# Altium PCB Psyduck.PcbDoc
Units mil, origin at the board's own origin, x right, y up, seen from the top; angles counter-clockwise.
Board outline 1737.95 x 1000.79 mil, 2 copper layers (Top Layer, Bottom Layer); 27 components, 22 nets, 107 pads, 17 vias.
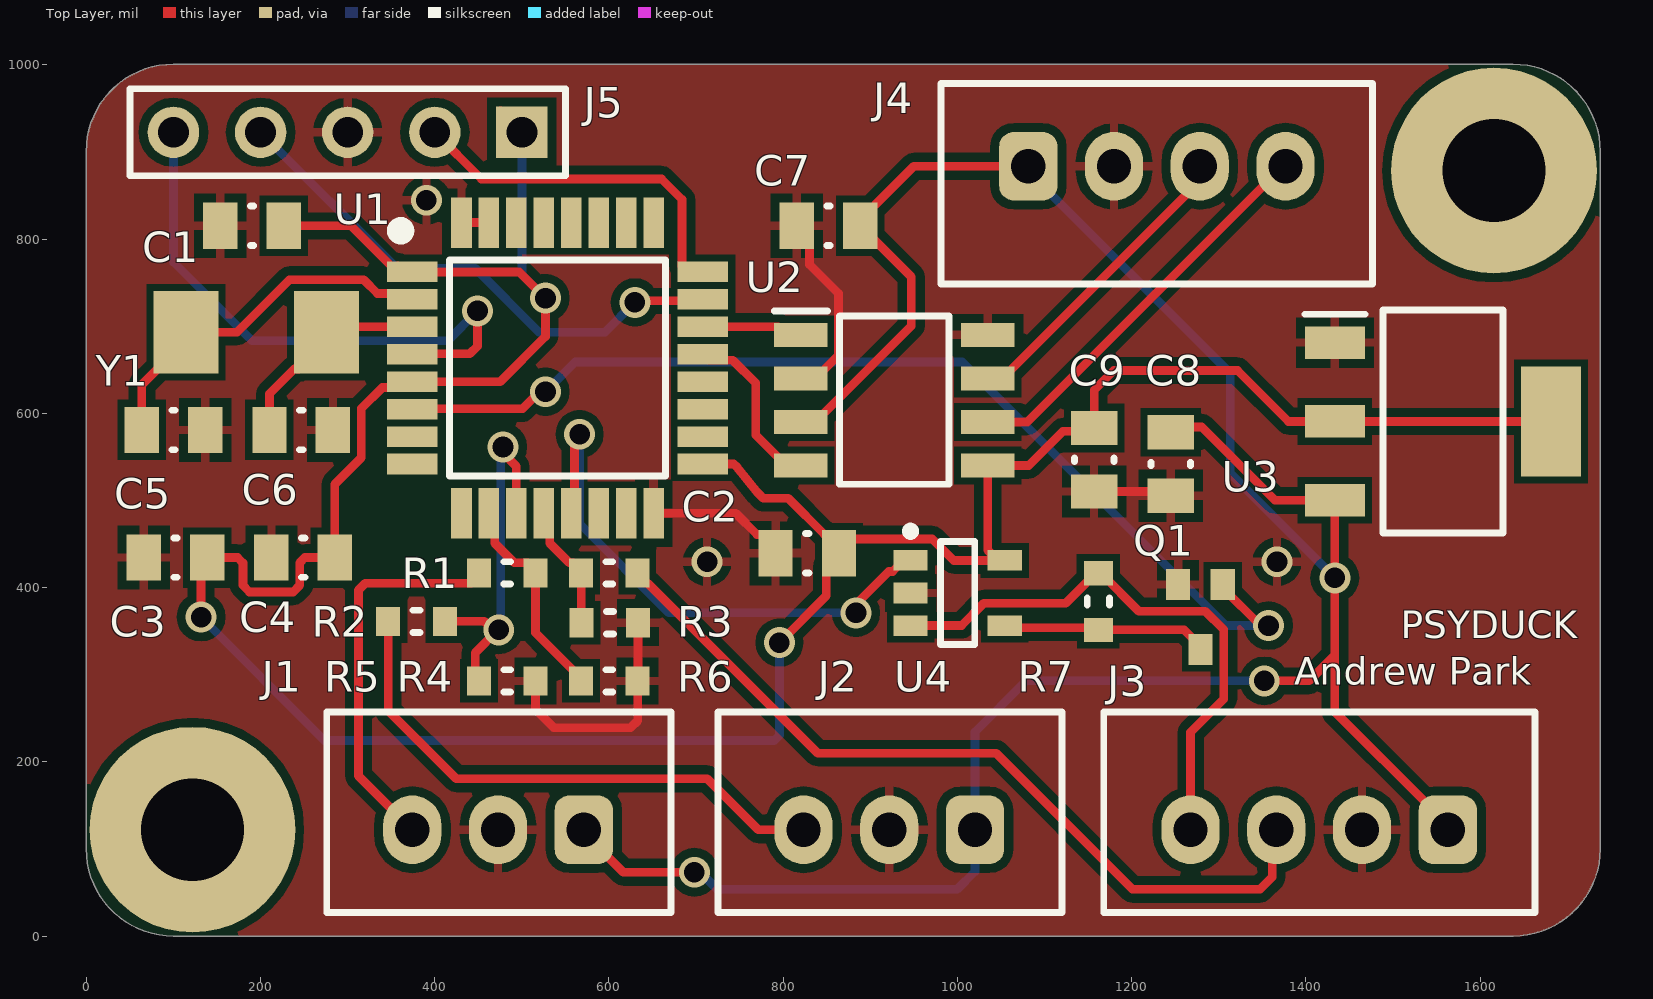
[diagram p0: Top Layer view]
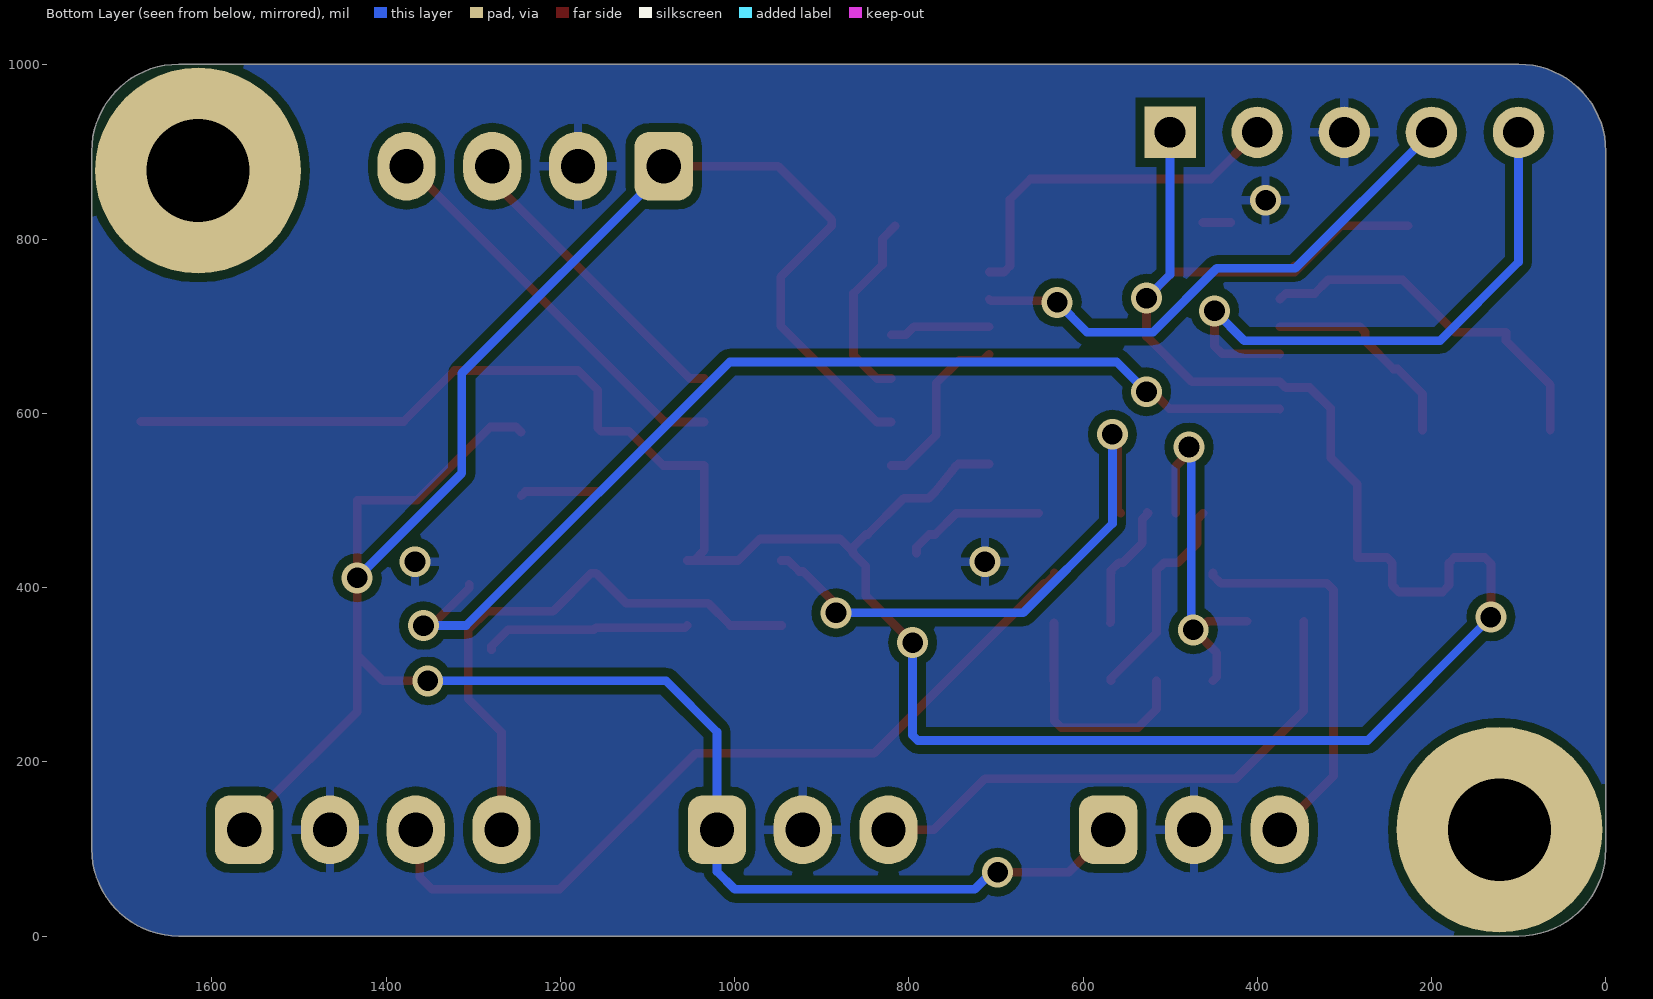
[diagram p1: Bottom Layer view, seen from below]
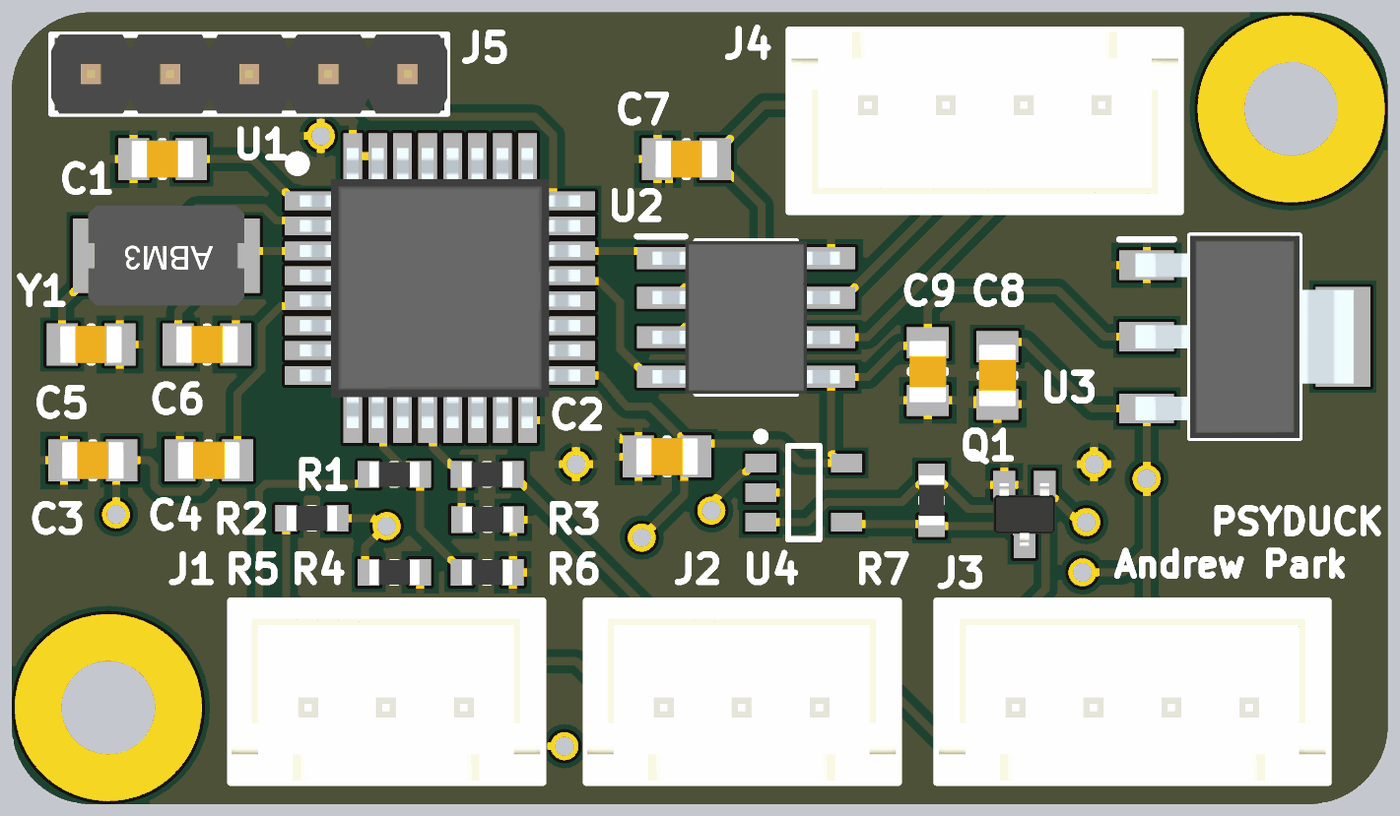
[diagram p2: 3D render of the assembled board from above, using the file's embedded part models]

## Layer stack, top to bottom
Top Solder: solder mask 0.4, Solder Resist, Dk 3.5
Top Layer: signal copper 1.4
Dielectric 1: dielectric 12.6, FR-4, Dk 4.8
Bottom Layer: signal copper 1.4
Bottom Solder: solder mask 0.4, Solder Resist, Dk 3.5

## Board outline
0,900.79 cw(c100,900.79) 100,1000.79 1637.95,1000.79 cw(c1637.95,900.79) 1737.95,900.79 1737.95,100 cw(c1637.95,100) 1637.95,0 100,0 cw(c100,100) 0,100

## Design rules (kind name [scope] priority, off if disabled: settings)
Clearance Clearance_1 [All] p1: gap=10 ignorepadtopadclearanceinfootprint=FALSE except(0: Arc-Hole Track-Hole SMDPad-Hole THPad-Hole Via-Hole Fill-Hole Poly-Hole Region-Hole Text-Text Text-Hole; 5: Arc-Arc Arc-Track Track-Track SMDPad-SMDPad; 7.87: Arc-SMDPad Track-SMDPad SMDPad-Fill SMDPad-Poly SMDPad-Region)
Clearance [All] p2: gap=10 ignorepadtopadclearanceinfootprint=FALSE except(0: Arc-Hole Track-Hole SMDPad-Hole THPad-Hole Via-Hole Fill-Hole Poly-Hole Region-Hole Text-Text Text-Hole; 5: Arc-Arc Arc-Track Track-Track SMDPad-SMDPad; 7.87: Arc-SMDPad Track-SMDPad SMDPad-Fill SMDPad-Poly SMDPad-Region)
ComponentClearance ComponentClearance_1 [InComponentClass('All Components') And (HasFootprint('0603 - Resistor'))] p1: gap=0 collisioncheckmode=3 verticalgap=10 showdistances=FALSE
ComponentClearance [All] p2: gap=10 collisioncheckmode=3 verticalgap=10 showdistances=FALSE
DiffPairsRouting [All] p1: maxlimit=10 minlimit=10 mostfreqgap=10 substack1={6880419E-5F7E-40DC-B808-49A93CB59D2A} toplayer_{6880419e-5f7e-40dc-b808-49a93cb59d2a}_minwidth=15 toplayer_{6880419e-5f7e-40dc-b808-49a93cb59d2a}_maxwidth=15 toplayer_{6880419e-5f7e-40dc-b808-49a93cb59d2a}_prefwidth=15 bottomlayer_{6880419e-5f7e-40dc-b808-49a93cb59d2a}_minwidth=15 bottomlayer_{6880419e-5f7e-40dc-b808-49a93cb59d2a}_maxwidth=15 bottomlayer_{6880419e-5f7e-40dc-b808-49a93cb59d2a}_prefwidth=15 toplayer_minwidth=15 toplayer_maxwidth=15 toplayer_prefwidth=15 bottomlayer_minwidth=15 bottomlayer_maxwidth=15 bottomlayer_prefwidth=15 maxuncoupledlength=500
PolygonConnect [All] p1: connectstyle=Relief reliefconductorwidth=10 reliefentries=4 polygonreliefangle="90 Angle" airgapwidth=10
RoutingVias [All] p1: holewidth=19.68 width=39.37 viastyle="Through Hole" minholewidth=7.87 minwidth=23.62 maxholewidth=28 maxwidth=50
SilkToSolderMaskClearance [IsPad] p1: minsilkscreentomaskgap=5.91 clearancetoexposedcopper=TRUE
SolderMaskExpansion [All] p1: expansion=4 istentingtop=FALSE
Width [All] p1: maxlimit=15 minlimit=10 preferedwidth=15 substack1={6880419E-5F7E-40DC-B808-49A93CB59D2A} toplayer_prefwidth=10 minimp=50.000000 maximp=50.000000 favimp=50.000000
26 further rules are at their usual default settings.

## Components (designator, comment, footprint, x,y, rotation, side; value= is the part's Value field where it differs from the comment)
C1 "Capacitor - Nonpolarized" "0805 - Capacitor" 190.39,815.28 r0 top value=100nF
C2 "Capacitor - Nonpolarized" "0805 - Capacitor" 827.68,439.37 r0 top value=100nF
C3 "Capacitor - Nonpolarized" "0805 - Capacitor" 102.52,434.49 r0 top value=10nF
C4 "Capacitor - Nonpolarized" "0805 - Capacitor" 248.98,434.49 r0 top value=1uF
C5 "Capacitor - Nonpolarized" "0805 - Capacitor" 100.28,580.94 r180 top value=28pF
C6 "Capacitor - Nonpolarized" "0805 - Capacitor" 246.73,580.94 r180 top value=28pF
C7 "Capacitor - Nonpolarized" "0805 - Capacitor" 852.09,815.28 r0 top value=100nF
C8 "Capacitor - Nonpolarized" "0805 - Capacitor" 1244.88,541.89 r90 top value=10mF
C9 "Capacitor - Nonpolarized" "0805 - Capacitor" 1157.01,546.77 r90 top value=10mF
J1 "B3B-EH-A" B3B-XH 571.18,122.05 r180 top
J2 "B3B-EH-A" B3B-XH 1020.32,122.05 r180 top
J3 "1x4 Header" B4B-XH 1562.99,122.05 r180 top
J4 "1x4 Header" B4B-XH 1081.42,883.62 r0 top
J5 "1x5 Header" HDR1X5 500.16,922.68 r180 top
Q1 "MOSFET-N" SC70/SOT323 1279.06,366.14 r0 top
R1 "Resistor" "0603 - Resistor" 483.31,416.81 r0 top value=10k
R2 "Resistor" "0603 - Resistor" 379.09,361.26 r0 top value=10k
R3 "Resistor" "0603 - Resistor" 600.47,416.81 r180 top value=10k
R4 "Resistor" "0603 - Resistor" 600.47,292.91 r180 top value=20k
R5 "Resistor" "0603 - Resistor" 483.31,292.91 r180 top value=20k
R6 "Resistor" "0603 - Resistor" 601.15,359.71 r180 top value=20k
R7 "Resistor" "0603 - Resistor" 1161.89,383.98 r90 top value=500m
U1 "STM32F303K6T6" QFP80P900X900X160-32N 541.02,652.13 r0 top
U2 "TJA1051T_3,118" TJA1051T/3,118 927.56,615.12 r0 top
U3 "TLV1117-33IDCYR" TLV1117 1557.32,590.71 r0 top
U4 "INA180" INA180 1000.35,393.78 r0 top
Y1 "Oscillator" "2-SMD NO LEAD CRSYSTAL" 195.28,693.23 r180 top

## Footprints (in the part's own frame and the unit in brackets; to place one, negate y for a bottom-side part, rotate by r counter-clockwise, add the part's x,y. Pads: shape width x height; smd on the part's side, far side on the other; paste and mask are expansions set on the pad)
"2-SMD NO LEAD CRSYSTAL" [mm]
  rect 1.9x2.4 smd: 1(-2.05,0) 2(2.05,0)
  body extent -2.5,-1.6 2.5,1.6, height 1.3
"0603 - Resistor" [mm] "0603 Chip Resistor - IPC Medium Density"
  rect 0.7x0.85 smd: 1(-0.825,0) 2(0.825,0)
  silkscreen extent -0.1,-0.33 0.1,0.33, body extent -0.8,-0.4 0.8,0.4, height 0.45
"0805 - Capacitor" [mm] "0805 Chip Capacitor - IPC Medium Density"
  rect 1x1.35 smd: 1(-0.925,0) 2(0.925,0)
  silkscreen extent -0.05,-0.58 0.05,0.58, body extent -1,-0.6 1,0.6, height 1.2
B3B-XH [mm] "JST 3-pin connector"
  rrect50% 1.7x2 hole 1: 1(0,0)
  oval 1.7x2 hole 1: 2(2.5,0) 3(5,0)
  silkscreen extent -2.54,-3.43 7.49,2.41, body extent -2.45,-3.4 7.45,2.35, height 7
B4B-XH [mm] "JST 4-Pin"
  rrect50% 1.7x2 hole 1: 1(0,0)
  oval 1.7x2 hole 1: 2(2.5,0) 3(5,0) 4(7.5,0)
  silkscreen extent -2.54,-3.43 10.03,2.41, body extent -2.45,-3.4 9.95,2.35, height 7
HDR1X5 [mm] "Connector; Header; 5 Position"
  rect 1.5x1.5 hole 0.9: 1(0,0)
  round 1.5 hole 0.9: 2(2.54,0) 3(5.08,0) 4(7.62,0) 5(10.16,0)
  silkscreen extent -1.27,-1.27 11.43,1.27, body extent -1.27,-1.27 11.43,1.27, height 8.54
INA180 [mm] "SOT23, 5-Leads, Body 2.80x2.80mm, Pitch 0.95mm, IPC Medium Density"
  rect 1x0.6 smd: 1(-1.375,0.95) 2(-1.375,0) 3(-1.375,-0.95) 4(1.375,-0.95) 5(1.375,0.95)
  silkscreen extent -1.5,-1.5 0.5,1.92, body extent -0.88,-1.5 0.87,1.5, height 1.1
QFP80P900X900X160-32N [mm]
  rect 1.475x0.6 smd: 1(-4.238,2.8) 2(-4.238,2) 3(-4.238,1.2) 4(-4.238,0.4) 5(-4.238,-0.4) 6(-4.238,-1.2) 7(-4.238,-2) 8(-4.238,-2.8) 17(4.238,-2.8) 18(4.238,-2) 19(4.238,-1.2) 20(4.238,-0.4) 21(4.238,0.4) 22(4.238,1.2) 23(4.238,2) 24(4.238,2.8)
  rect 0.6x1.475 smd: 9(-2.8,-4.238) 10(-2,-4.238) 11(-1.2,-4.238) 12(-0.4,-4.238) 13(0.4,-4.238) 14(1.2,-4.238) 15(2,-4.238) 16(2.8,-4.238) 25(2.8,4.238) 26(2,4.238) 27(1.2,4.238) 28(0.4,4.238) 29(-0.4,4.238) 30(-1.2,4.238) 31(-2,4.238) 32(-2.8,4.238)
  silkscreen extent -4.77,-3.15 3.15,4.2, body extent -4.5,-4.5 4.5,4.5, height 1.6
SC70/SOT323 [mm]
  rect 0.7x0.9 smd: 1(0.65,0.95) 2(0,-0.95) 3(-0.65,0.95)
  body extent -1,-1 1,1, height 1.05
TJA1051T/3,118 [mm] "SOIC127P600X175-8N"
  rect 1.55x0.7 smd: 1(-2.725,1.905) 2(-2.725,0.635) 3(-2.725,-0.635) 4(-2.725,-1.905) 5(2.725,-1.905) 6(2.725,-0.635) 7(2.725,0.635) 8(2.725,1.905)
  silkscreen extent -3.5,-2.45 1.6,2.61, body extent -3,-2.45 3,2.45, height 1.75
TLV1117 [mm] "SOT230P700X180-4N"
  rect 1.75x0.95 smd: 1(-3.15,2.3) 2(-3.15,0) 3(-3.15,-2.3)
  rect 1.75x3.2 smd: 2(3.15,0)
  silkscreen extent -4.03,-3.25 1.75,3.25, body extent -3.5,-3.25 3.5,3.25, height 1.8

## Part data
C1 C2 C3 C4 C5 C6 C7 C8 C9: "Nonpolarized Capacitor"
J1 J2: library part "1x3 Header", "1x3 Pin Header"
J3 J4: "1x4 Pin Header"
J5: "1x5 Pin Header"
Q1: "N-Channel MOSFET"
U1: "Integrated Circuit"
U2: "CAN Transceiver IC 4.5V-5.5V 250ns", Manufacturer=NXP, Manufacturer Part Number=TJA1051T/3,118, Supplier Part Number=568-8684-1-ND, Datasheet=http://www.nxp.com/docs/en/data-sheet/TJA1051.pdf, Supplier=Digikey
U3: "Linear Voltage Regulator IC 3.3V 800MA SOT223-4", Manufacturer="Texas Instruments", Supplier Part Number=296-21112-1-ND, Datasheet=http://www.ti.com/lit/ds/symlink/tlv1117.pdf?HQS=TI-null-null-digikeymode-df-pf-null-wwe&ts=1590668900314, Manufacturer Part Number=TLV1117-33IDCYR, Supplier=Digikey
U4: "0V to 26V Current Sense Amplifier", Manufacturer="Texas Instruments", Manufacturer Part Number=INA180A2IDBVR, Supplier Part Number=296-47653-1-ND, Datasheet=https://www.ti.com/lit/ds/symlink/ina180.pdf, Supplier=Digikey
Y1: "Crystal Oscillator"

## Free pads (board coordinates)
  round 236.22 hole 118.11: MOUNT1(1615.91,878.74) MOUNT2(122.05,122.05)

## Via types
v1: diameter 35.43, hole 23.62, Top Layer to Bottom Layer, 17 vias

## Nets (pads, with @x,y where several pads share a name; then routed paths per layer and width w, separated by ;. In a path a pad name is that pad's centre, name@x,y a point inside that pad or via, vN(x,y) a via of type N, cw(c..) or ccw(c..) an arc to the next point about the centre after c; other vN are vias at no path point)
+3.3V: C1.2 C2.2 C3.2 C4.2 C9.2 J5.1 U1.1 U1.5 U1.17 U2.5 U3.2 U4.5 | length 3558.5
  Top Layer w10: v1(131.81,366.14) 131.81,427.36 C3.2 173.62,434.49 180,428.11 180,402.58 187.54,395.04 237.58,395.04 245.12,402.58 245.12,428.63 250.98,434.49 C4.2 285.39,518.72 315.71,549.04 315.71,605.47 339.81,629.57 367.36,629.57 U1.5 475.28,636.38 527.24,688.35 v1(527.24,732.28) 497.17,762.36 U1.1 U1.1@364.57,762.36 ; C1.2 304.04,815.28 356.95,762.36 U1.1@364.57,762.36 ; U1.1@357.76,769.17 U1.1@364.57,762.36 ; J5.1@475.63,947.2 J5.1 ; U1.17 743.46,541.89 746.39,538.96 746.76,538.6 747.06,538.22 cw(c739.32,531.89) 747.11,538.16 771.34,508.36 771.7,507.99 774.11,505.59 777.2,502.5 805.83,502.5 847.39,460.94 849.41,460.94 C2.2@864.09,446.26 ; v1(795.75,336.85) 849.41,390.51 849.41,424.68 C2.2 864.09,441.18 866.63,443.72 878.78,455.87 971.24,455.87 995.92,431.18 U4.5@1046.61,431.18 ; U4.5 U4.5@1046.61,431.18 ; U3.2@1681.34,590.71 1433.31,590.71 1380.14,590.71 1321.56,649.29 1179.5,649.29 1157.01,626.8 C9.2 1153.22,579.4 1121.29,579.4 1082.01,540.12 U2.5 1034.84,442.95 U4.5@1046.61,431.18
  Bottom Layer w10: v1(131.81,366.14) 273.39,224.57 789.89,224.57 795.75,230.42 v1(795.75,336.85) ; J5.1 500.16,759.37 v1(527.24,732.28)
+5V: C7.2 C8.2 J1.1 J2.1 J3.1 J4.1 U2.3 U3.3 | length 2946.7
  Top Layer w10: J1.1 571.18,118.39 616.34,73.23 v1(698.11,73.23) ; U2.3 837.01,590.12 947.09,700.2 947.09,756.69 C7.2 888.5,822.17 949.96,883.62 J4.1 J4.1@1081.42,877.72 ; C8.2 1250.86,584.28 1280.6,584.28 1364.72,500.16 U3.3 v1(1433.31,411.18) 1433.31,322.2 ; v1(1352.28,292.91) 1404.02,292.91 1433.31,322.2 ; J3.1@1541.51,143.52 1560.04,125 J3.1 1562.99,127.95 1544.47,146.48 1433.31,257.64 1433.31,322.2
  Bottom Layer w10: v1(698.11,73.23) 704.99,73.23 724.52,53.7 999.81,53.7 1020.32,74.2 J2.1 1020.32,234.33 1078.9,292.91 v1(1352.28,292.91) ; J4.1 1081.42,877.72 1313.23,645.91 1313.23,531.26 v1(1433.31,411.18)
ADC1: R1.2 R4.2 U1.10 | length 245.3
  Top Layer w10: U1.10 469.09,478.46 469.09,450.91 491.46,428.54 507.01,428.54 515.79,419.76 515.79,348.07 567.99,295.87 R4.2
ADC2: R2.2 R5.2 U1.11 | length 432.6
  Top Layer w10: R2.2 456.9,361.26 466.66,351.5 v1(473.54,351.5) 472.71,351.5 446.46,325.24 446.46,297.28 R5.2 ; v1(478.43,561.42) 478.43,554.54 493.78,539.18 U1.11
  Bottom Layer w10: v1(473.54,351.5) 475.98,353.94 475.98,558.98 v1(478.43,561.42)
ADC3: R3.2 R6.2 U1.12 | length 147.7
  Top Layer w10: U1.12@526.26,486.26 U1.12 532.09,478.46 532.09,450.91 554.45,428.54 559.21,428.54 567.99,419.76 R3.2 568.33,416.47 568.33,360.05 R6.2
ADC4: U1.13 U4.1 | length 650.3
  Top Layer w10: U1.13 560.6,489.11 560.6,563.48 566.3,569.18 v1(566.3,576.06) ; v1(883.62,371.02) 883.62,380.88 921.2,418.46 925.63,418.46 938.35,431.18 U4.1
  Bottom Layer w10: v1(566.3,576.06) 566.3,473.54 668.82,371.02 v1(883.62,371.02)
BRAKE-: J3.4 R7.2 U4.3 | length 656.6
  Top Layer w10: U4.3 1004.79,356.38 1030.44,382.03 1124.51,382.03 1158.94,416.46 R7.2 1164.84,416.46 1208.35,372.95 1284.55,372.95 1305.71,351.79 1305.71,272.02 1267.72,234.02 J3.4
CANH: J4.3 U2.7 | length 354.1
  Top Layer w10: U2.7 1051.57,640.12 1118.98,707.52 1278.27,866.81 J4.3
CANL: J4.4 U2.6 | length 463.4
  Top Layer w10: U2.6 1080.36,590.12 1373.87,883.62 J4.4
CANRX: U1.21 U2.4 | length 200.3
  Top Layer w10: U1.21 714.68,661.06 742.24,661.06 768.5,634.8 768.5,575.16 803.54,540.12 U2.4
CANTX: U1.22 U2.1 | length 116.2
  Top Layer w10: U1.22 794.29,699.37 803.54,690.12 U2.1
CONTROL: Q1.1 U1.6 | length 1205.2
  Top Layer w10: U1.6 374.65,605.35 500.83,605.35 520.36,624.88 v1(527.24,624.88) ; Q1.1 1304.65,399.61 1347.87,356.38 v1(1357.17,356.38)
  Bottom Layer w10: v1(527.24,624.88) 561.42,659.06 1005.67,659.06 1308.35,356.38 v1(1357.17,356.38)
GND: C1.1 C2.1 C3.1 C4.1 C5.1 C6.1 C7.1 C8.1 C9.1 J1.2 J2.2 J3.2 J4.2 J5.3 Q1.3 R4.1 R5.1 R6.1 U1.16 U1.31 U1.32 U2.2 U2.8 U3.1 U4.2 | length 781.7
  Top Layer w10: U1.32 U1.31 ; R5.1 515.79,260.43 537.01,239.21 624.88,239.21 632.95,247.28 R4.1 633.29,293.25 633.29,359.37 R6.1 ; U1.16 745.7,485.28 770.03,460.94 776.57,460.94 791.26,446.26 C2.1 ; C7.1 830.35,800.59 830.35,770.91 863.66,737.6 863.66,666.77 837.01,640.12 U2.2 ; C9.1 1240,510.35 C8.1
  other v1: 712.76,429.61 1366.93,429.61 390.55,844.57
NetC5_2: C5.2 U1.2 Y1.2 | length 427.1
  Top Layer w10: C5.2 63.86,632.68 114.57,683.39 Y1.2 173.13,693.23 233.25,753.35 318.72,753.35 334.39,737.68 367.36,737.68 U1.2
NetC6_2: C6.2 U1.3 Y1.1 | length 243
  Top Layer w10: C6.2 210.32,622.52 238.78,650.98 243.58,650.98 275.98,683.39 Y1.1 282.13,699.37 U1.3
NetQ1_2: Q1.2 R7.1 U4.4 | length 238.3
  Top Layer w10: U4.4 1056.93,353.94 1159.45,353.94 R7.1 1260.24,351.5 1279.06,332.68 Q1.2
NRESET: J5.5 U1.4 | length 668.8
  Top Layer w10: U1.4 374.65,668.35 421.18,668.35 440.32,668.35 449.13,677.16 v1(449.13,717.64)
  Bottom Layer w10: J5.5 100.16,773.7 190.39,683.46 414.96,683.46 v1(449.13,717.64)
PSENSOR1: J1.3 R1.1 | length 449
  Top Layer w10: J1.3 312.44,183.94 312.44,397.07 320.45,405.08 442.05,405.08 450.83,413.86 R1.1
PSENSOR2: J2.3 R2.1 | length 636
  Top Layer w10: R2.1 346.61,258.74 424.72,180.63 712.76,180.63 771.34,122.05 J2.3
PSENSOR3: J3.3 R3.1 | length 942.7
  Top Layer w10: R3.1 632.95,413.86 641.73,405.08 644.68,405.08 839.84,209.92 1044.72,209.92 1200.94,53.7 1347.4,53.7 1361.38,67.68 1361.38,117.28 J3.3
SWCLK: J5.2 U1.24 | length 418.8
  Top Layer w10: J5.2 453.86,868.98 660.31,868.98 683.84,845.45 683.84,769.17 690.65,762.36 U1.24
SWDIO: J5.4 U1.23 | length 637.9
  Top Layer w10: J5.4@180.63,922.68 J5.4 ; v1(629.76,727.4) 631.5,729.13 706.14,729.13 U1.23
  Bottom Layer w10: J5.4 356.38,766.46 446.58,766.46 519.81,693.23 595.59,693.23 v1(629.76,727.4)
pads on no net: U1.7 U1.8 U1.9 U1.14 U1.15 U1.18 U1.19 U1.20 U1.25 U1.26 U1.27 U1.28 U1.29 U1.30

## Polygon pours and split planes (outlines as drawn)
GND on Top Layer "GND_L01_P004" (solid, remove dead copper, pour order 4): 0,900.79 cw(c100,900.79) 100,1000.79 1637.95,1000.79 cw(c1637.95,900.79) 1737.95,900.79 1737.95,100 cw(c1637.95,100) 1637.95,0 100,0 cw(c100,100) 0,100
GND on Bottom Layer "GND_L02_P005" (solid, remove dead copper, pour order 5): 0,900.79 cw(c100,900.79) 100,1000.79 1637.95,1000.79 cw(c1637.95,900.79) 1737.95,900.79 1737.95,100 cw(c1637.95,100) 1637.95,0 100,0 cw(c100,100) 0,100

## Silkscreen, mask and mechanical layers (free items; w line width, h text height)
Top Overlay:
  text "PSYDUCK" at 1508.74,341.97 h31.5
  text "Andrew Park" at 1386.69,288.27 h31.5
Mechanical 1:
  lines w1: 1480,-0.5 100,-0.5 cw(c100,100) -0.5,100 -0.5,900 cw(c100,900) 100,1000.5 1480,1000.5
  lines w3.94: -1.97,100 ccw(c100,100) 100,-1.97 1637.95,-1.97 ccw(c1637.95,100) 1739.92,100 1739.92,900.79 ccw(c1637.95,900.79) 1637.95,1002.76 100,1002.76 ccw(c100,900.79) -1.97,900.79 -1.97,100